# EAGLE board Mask (EAGLE 8.7.1)
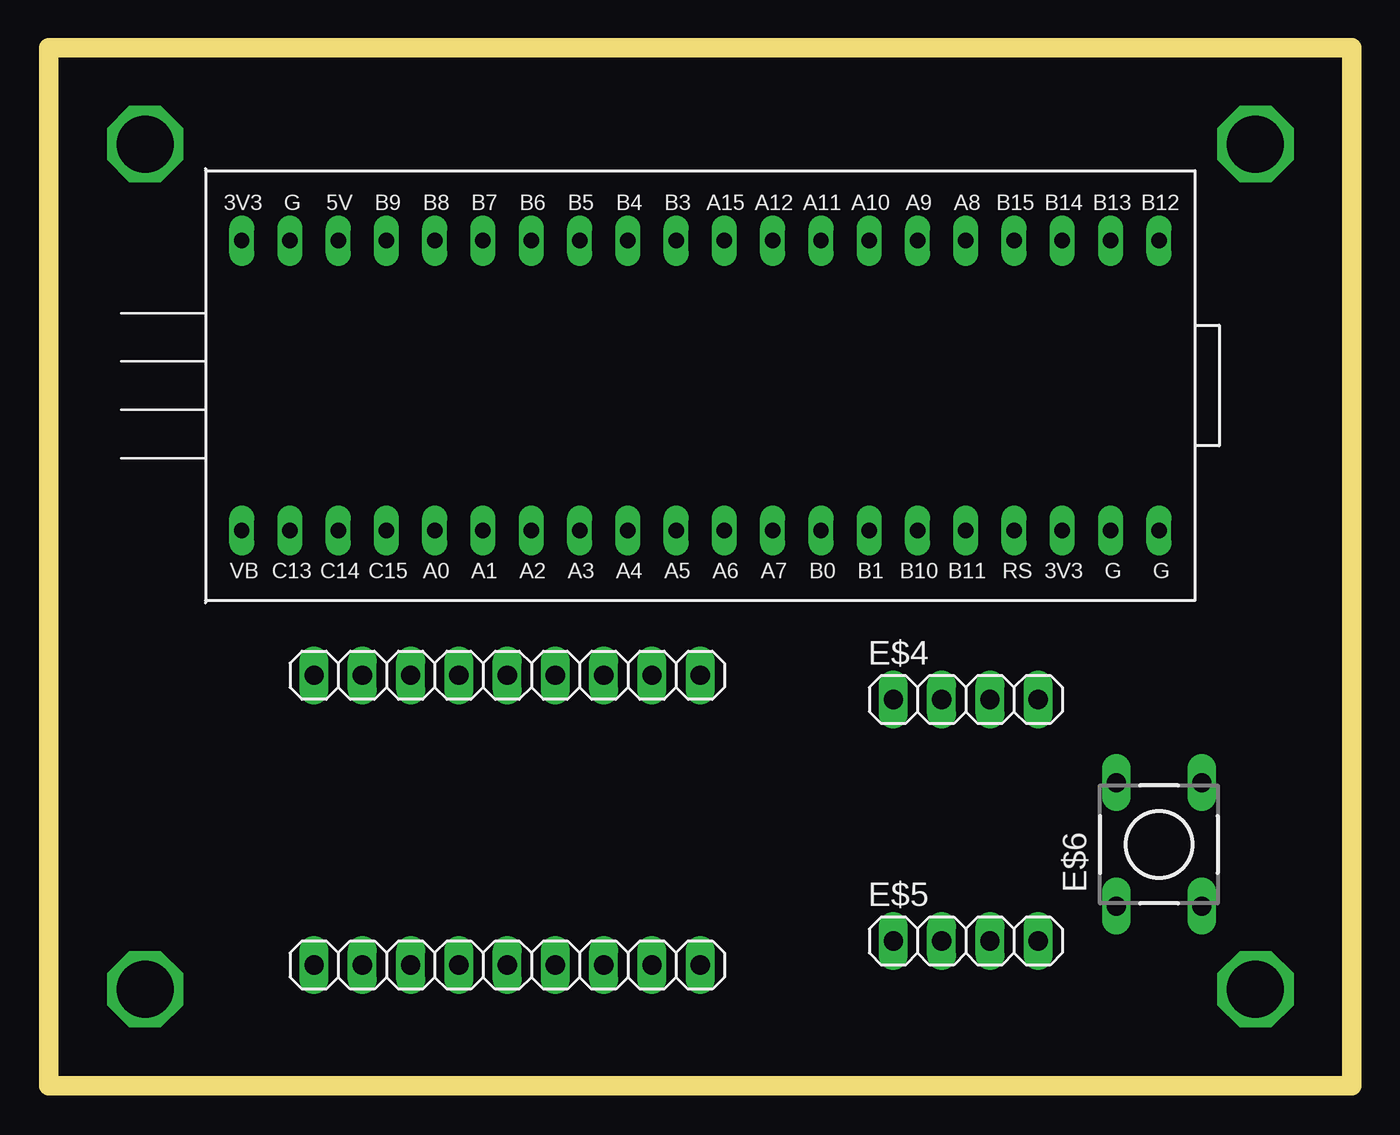
[diagram p0: board, top side]
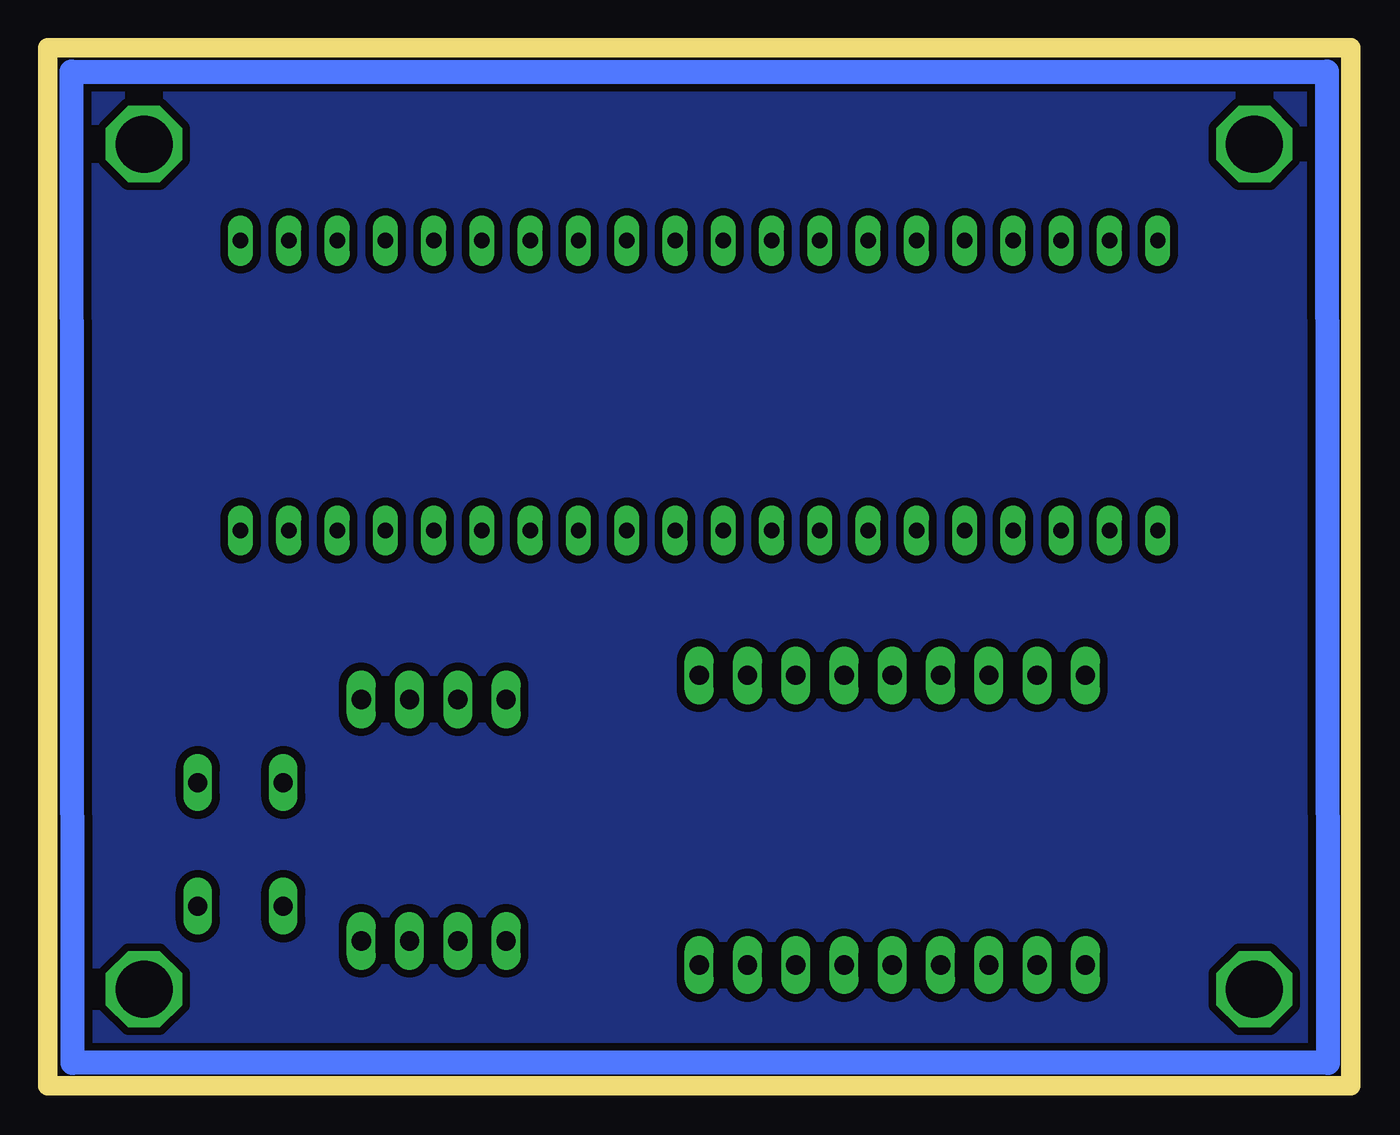
[diagram p1: board, bottom side, seen from below]

Size 68.58 x 54.61 mm. Coordinates in mm from the lower left corner, seen from the top.
Outline: 0,54.61 0,0 68.58,0 68.58,54.61 0,54.61
Copper layers (1*16): Top 0.035mm / dielectric 1.5mm / Bottom 0.035mm
Design rules "default": minimum track width 6mil, minimum drill 0.35mm, track to track 6mil, track to pad 6mil, pad to pad 6mil, via to via 6mil, smd to smd 6mil, copper to edge 40mil, drill to drill 6mil, minimum pad ring 10mil, minimum via ring 8mil, stop-mask expansion 4mil, vias tented up to drill 0mil, thermal gap 10mil

## Footprints (pad centres in the part's own frame; a part is rotated, then mirrored left to right if it is on the bottom)
1X09 = drill 1.016 long: 1 -10.16,0; 2 -7.62,0; 3 -5.08,0; 4 -2.54,0; 5 0,0; 6 2.54,0; 7 5.08,0; 8 7.62,0; 9 10.16,0
DIL40 = drill 0.813 long: 1 -24.13,-7.62; 2 -21.59,-7.62; 3 -19.05,-7.62; 4 -16.51,-7.62; 5 -13.97,-7.62; 6 -11.43,-7.62; 7 -8.89,-7.62; 8 -6.35,-7.62; 9 -3.81,-7.62; 10 -1.27,-7.62; 11 1.27,-7.62; 12 3.81,-7.62; 13 6.35,-7.62; 14 8.89,-7.62; 15 11.43,-7.62; 16 13.97,-7.62; 17 16.51,-7.62; 18 19.05,-7.62; 19 21.59,-7.62; 20 24.13,-7.62; 21 24.13,7.62; 22 21.59,7.62; 23 19.05,7.62; 24 16.51,7.62; 25 13.97,7.62; 26 11.43,7.62; 27 8.89,7.62; 28 6.35,7.62; 29 3.81,7.62; 30 1.27,7.62; 31 -1.27,7.62; 32 -3.81,7.62; 33 -6.35,7.62; 34 -8.89,7.62; 35 -11.43,7.62; 36 -13.97,7.62; 37 -16.51,7.62; 38 -19.05,7.62; 39 -21.59,7.62; 40 -24.13,7.62
1X04 = drill 1.016 long: 1 -3.81,0; 2 -1.27,0; 3 1.27,0; 4 3.81,0
DTS-6 = drill 1 long: 1 -3.25,2.25; 2 3.25,2.25; 3 -3.25,-2.25; 4 3.25,-2.25

## Placement (x,y rotation side)
E$1  [1X09]  24.13,21.59 0 top
E$2  [1X09]  24.13,6.35 0 top
E$3  [DIL40]  34.29,36.83 0 top
E$4  [1X04]  48.26,20.32 0 top
E$5  [1X04]  48.26,7.62 0 top
E$6  [DTS-6]  58.42,12.7 90 top

## Library data of the parts
E$1 E$2 E$4 E$5 = pinhead
E$3 = STM32BluePill1
E$6 = switch-tact

## Tracks (layer width: path | path; a pad name or v marks a point on that pad's centre or on a via)
S$3
  Bottom 1.27: 1.27,53.34 1.21,1.2 67.25,1.2 67.31,53.34 1.27,53.34
S$10
  pour Bottom (isolate 0.406): 1.27,53.34 67.31,53.34 67.31,1.27 1.27,1.27
S$12  (via drill 3 pad 4)
  other vias: 5.08,49.53
S$13  (via drill 3 pad 4)
  other vias: 63.5,49.53
S$14  (via drill 3 pad 4)
  other vias: 63.5,5.08
S$15  (via drill 3 pad 4)
  other vias: 5.08,5.08

## Text on the board
tTest: STM32f103 | RX | TX | VCC | 5V | RX | TX | GND | FTDI | GY-25 | 5V | G